# Altium PCB Controlador de velocidad - Placa fuente.PcbDoc
Units mil, origin at the board's own origin, x right, y up, seen from the top; angles counter-clockwise.
Board outline 3356.49 x 1466.72 mil, 2 copper layers (Top Layer, Bottom Layer); 28 components, 19 nets, 80 pads, 6 vias.
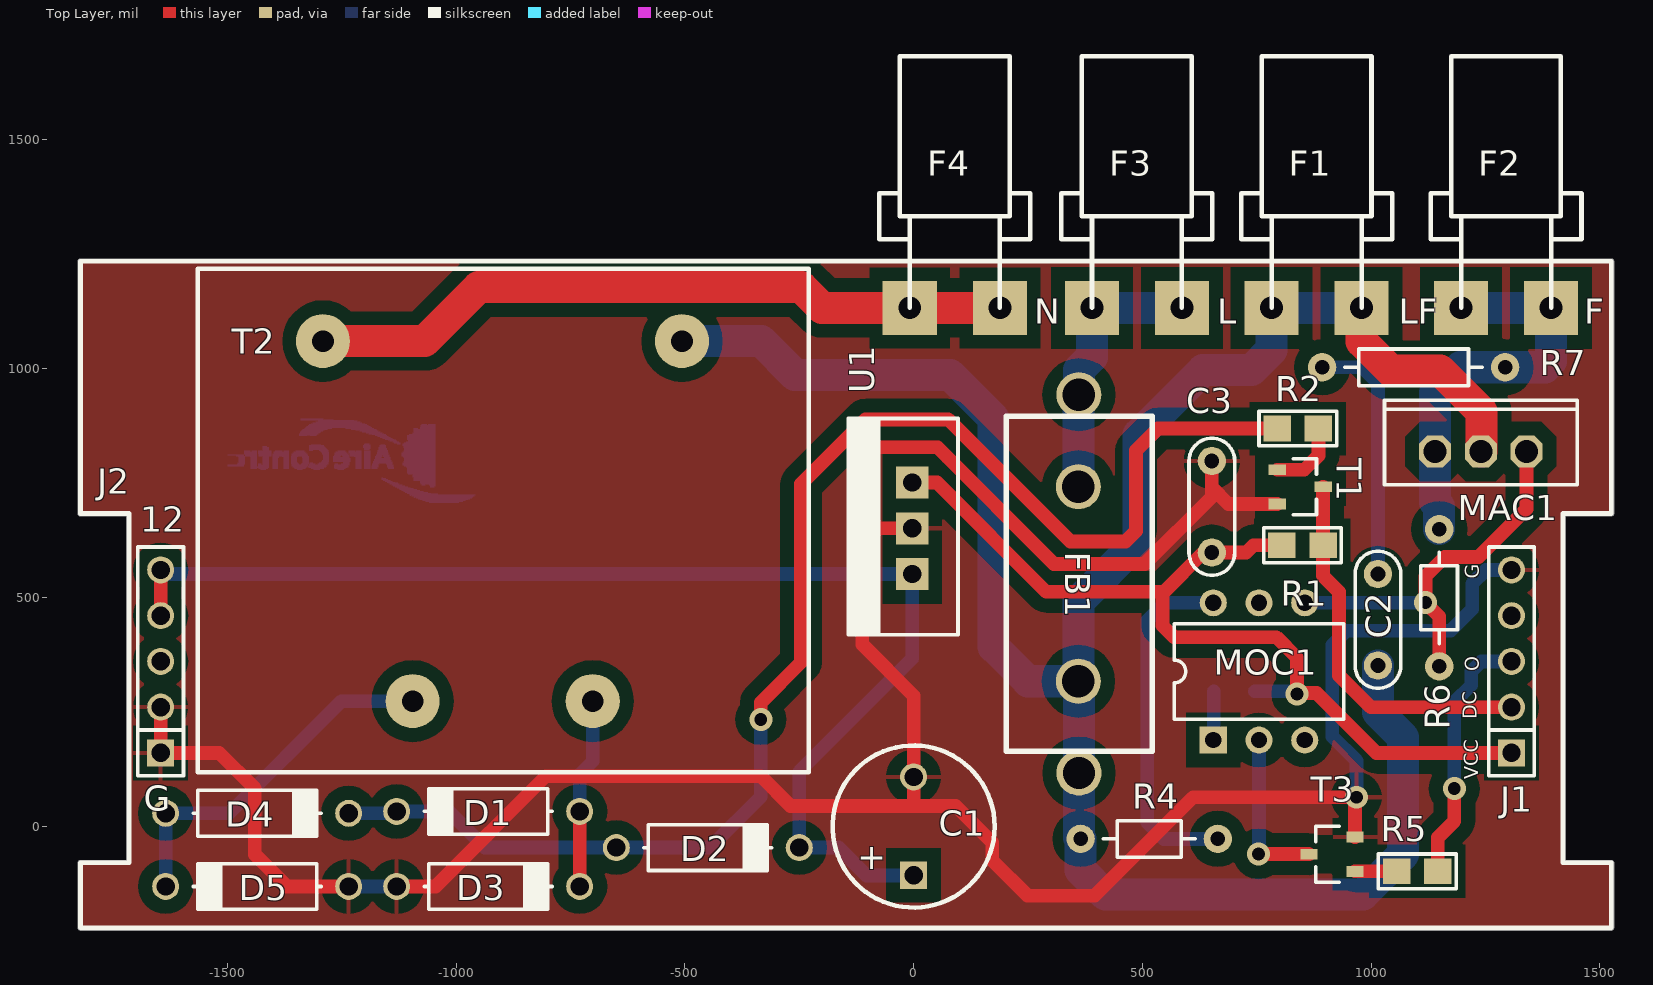
[diagram p0: Top Layer view]
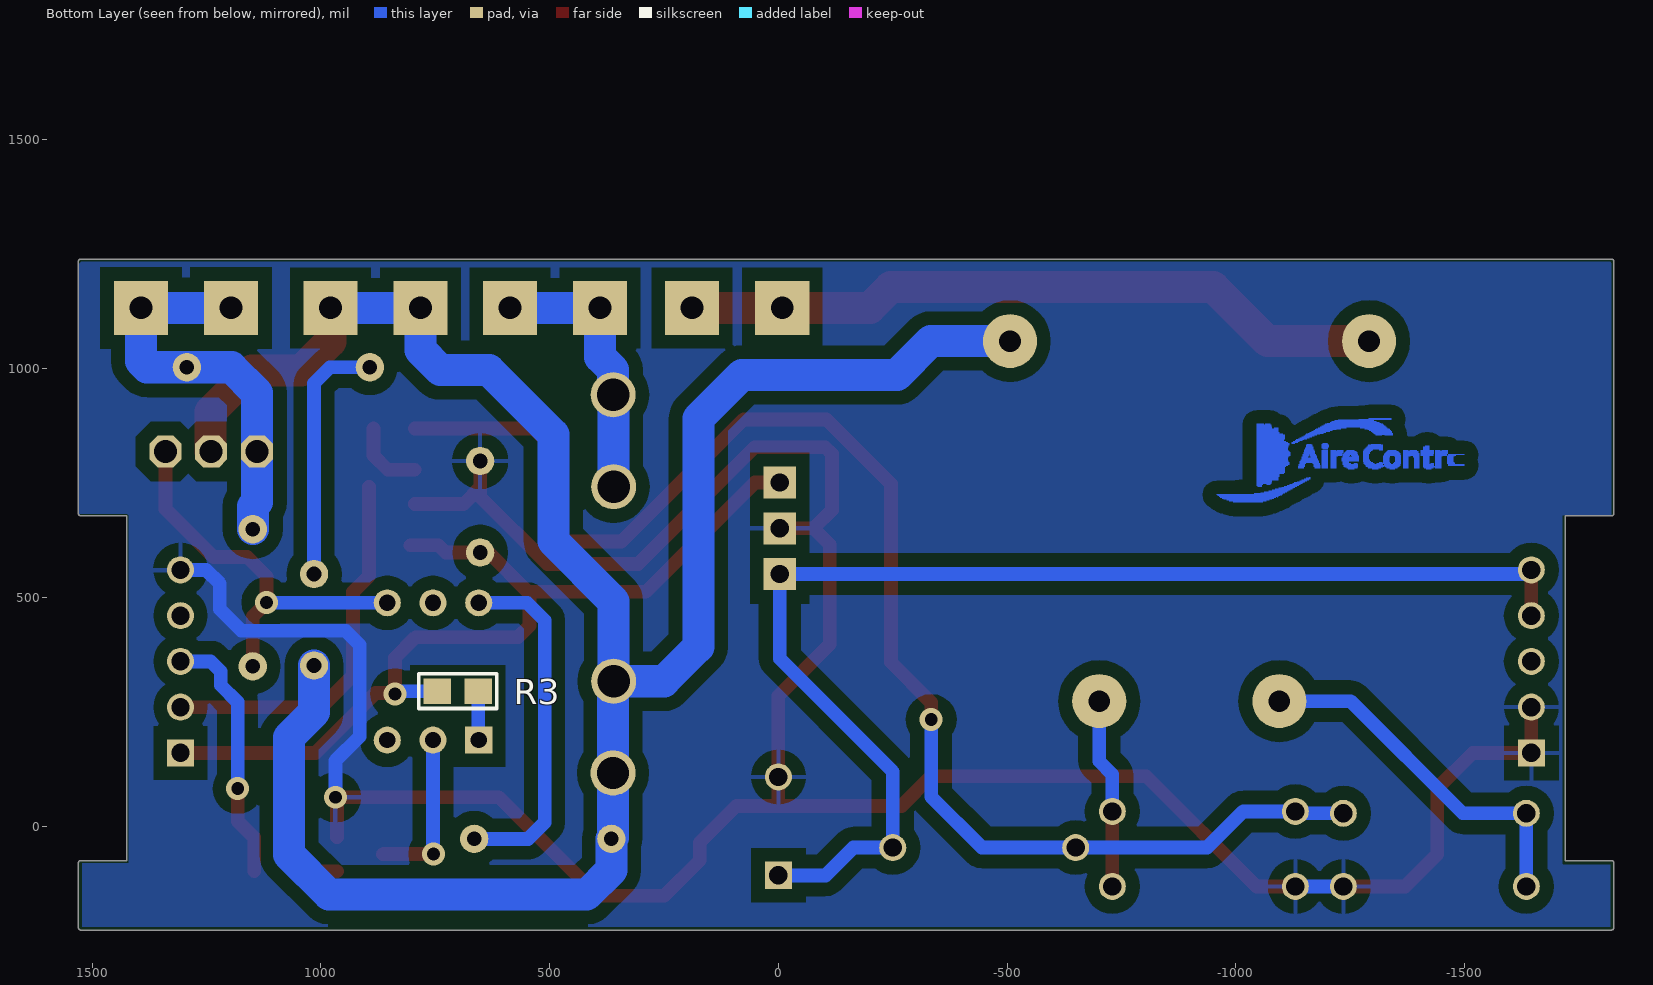
[diagram p1: Bottom Layer view, seen from below]

## Layer stack, top to bottom
Top Layer: signal copper 1.4
Dielectric: dielectric 12.6, FR-4, Dk 4.8
Bottom Layer: signal copper 1.4

## Board outline
-1821.25,-227.22 cw(c-1821.25,-222.21) -1826.26,-222.21 -1826.26,-80.48 cw(c-1821.25,-80.48) -1821.25,-75.46 -1719.96,-75.46 -1719.96,678.29 -1821.25,678.29 cw(c-1821.25,683.3) -1826.26,683.3 -1826.26,1234.48 cw(c-1821.25,1234.48) -1821.25,1239.5 1525.21,1239.5 cw(c1525.21,1234.48) 1530.22,1234.48 1530.22,683.3 cw(c1525.21,683.3) 1525.21,678.29 1423.92,678.29 1423.92,-75.46 1525.21,-75.46 cw(c1525.21,-80.48) 1530.22,-80.48 1530.22,-222.21 cw(c1525.21,-222.21) 1525.21,-227.22

## Design rules (kind name [scope] priority, off if disabled: settings)
Clearance GND [InPolygon] p1: gap=30
Clearance Clearance_1 [All] p2: gap=15
PolygonConnect [All] p1: connectstyle=Relief reliefconductorwidth=10 reliefentries=4 polygonreliefangle="90 Angle"
RoutingVias [All] p1: holewidth=28 width=50 viastyle="Through Hole" minholewidth=28 minwidth=50 maxholewidth=28 maxwidth=50
SilkscreenOverComponentPads SilkToSolderMaskClearance [IsPad] p1: minsilkscreentomaskgap=10
SolderMaskExpansion [All] p1: expansion=4
TestPointUsage FabricationTestPointUsage [All] p1: valid=0 allowmultiple=FALSE
Testpoint FabricationTestpoint [All] p1: side=3 testpointundercomponent=TRUE minsize=40 maxsize=100 preferedsize=60 minholesize=0 maxholesize=40 preferedholesize=32 testpointgrid=1 style=297 order=0123456789
Width 220V [InNet('L','220V','N','NetF3_1','NetF2_1')] p1: maxlimit=70 minlimit=10 preferedwidth=10 toplayer_minwidth=70 toplayer_prefwidth=70 bottomlayer_minwidth=70 bottomlayer_prefwidth=70 minimp=50.000000 maximp=50.000000 favimp=50.000000
Width Width_1 [All] p2: maxlimit=30 minlimit=10 preferedwidth=10 toplayer_minwidth=30 toplayer_prefwidth=30 bottomlayer_minwidth=30 bottomlayer_prefwidth=30 minimp=50.000000 maximp=50.000000 favimp=50.000000
23 further rules are at their usual default settings.

## Components (designator, comment, footprint, x,y, rotation, side; value= is the part's Value field where it differs from the comment)
C1 "1000uF/25V" CAP300RP 0,-1 r90 top
C2 "0.01uF" CAP200 1015,451 r90 top
C3 "CAP" CAP200 652,698 r270 top
D1 "DIODO" DO41 -930,32 r180 top
D2 "DIODO" DO41 -450,-47 r0 top
D3 "DIODO" DO41 -930,-132 r0 top
D4 "DIODO" DO41 -1435,28 r0 top
D5 "DIODO" DO41 -1435,-132 r180 top
F1 "Faston" Faston_V 881,1333 r0 top (schematic designator F11)
F2 "Faston" Faston_V 1295,1333 r0 top (schematic designator F11)
F3 "L" Faston_V 488,1333 r0 top (schematic designator F11)
F4 "N" Faston_V 90,1333 r0 top (schematic designator F11)
FB1 "Fusible" Porta_fuse_2 361,943 r270 top
J1 "CON5" SIP5 1307,160 r90 top
J2 "CON5" SIP5 -1646,160 r90 top
MAC1 "MAC8x" TO-220_vert 1140,819 r0 top (schematic designator MAC3)
MOC1 "MOC3023" 4N33 655,188 r0 top (schematic designator MOC3)
R1 "10K" 0805 850,614 r180 top
R2 "10K" 0805 840,869 r0 top
R3 "220" 0805 701,295 r0 bottom
R4 "1k" RES300 365,-28 r0 top
R5 "10k" 0805 1101,-99 r180 top
R6 "220" RES300 1149,649 r270 top
R7 "120" RES400 893,1003 r0 top
T1 "TRANSISTOR NPN" SOT23 795,779 r270 top
T2 "UC30D-2-120018" Trafo_220_12_1 -229,1218 r180 top (schematic designator T1)
T3 "TRANSISTOR NPN" SOT23 965,-99 r90 top (schematic designator T2)
U1 "7805" "TO-220 V" -3,651 r90 top

## Footprints (in the part's own frame and the unit in brackets; to place one, negate y for a bottom-side part, rotate by r counter-clockwise, add the part's x,y. Pads: shape width x height; smd on the part's side, far side on the other; paste and mask are expansions set on the pad)
4N33 [mm]
  rect 1.5x1.5 hole 0.9: 1(0,0)
  round 1.5 hole 0.9: 2(2.54,0) 3(5.08,0) 4(5.08,7.62) 5(2.54,7.62) 6(0,7.62)
  silkscreen extent -2.16,1.16 7.24,6.46
0805 [mil] "Pasivo 0805"
  rect 60x56 smd: 1(-45,0) 2(45,0)
  silkscreen extent -85,-38 85,38, body extent -40,-25 39,25, height 15
CAP200 [mil]
  round 62 hole 32: 1(-100,0) 2(100,0)
  silkscreen extent -150,-50 150,50, body extent -110,-46 110,44, height 246
CAP300RP [mm]
  rect 1.5x1.5 hole 1.016: 1(-2.705,0)
  round 1.5 hole 1.016: 2(2.755,0)
  silkscreen extent -4.5,-4.5 4.5,4.5
DO41 [mm]
  round 1.5 hole 1.016: 1(-5.08,0) 2(5.08,0)
  silkscreen extent -3.56,-1.27 3.56,1.27, body extent -5.46,-1.19 5.46,1.37, height 2.03
Faston_V [mm]
  round 1.651 on Top Overlay: 0(0,6.223)
  rect 3x3 hole 1.27: 1(-2.501,-5.08) 2(2.501,-5.08)
  silkscreen extent -4.19,-5.08 4.19,8.89
Porta_fuse_2 [mm] "10"
  round 2.5 hole 1.8: 1(0.003,0.002) 2(21.003,0.012) 3(15.91,-0.02) 4(5.11,-0.02)
  silkscreen extent 1.19,-4.03 19.79,4.07
RES300 [mil]
  round 62 hole 32: 1(0,0) 2(300,0)
  silkscreen extent 50,-40 250,40, body extent -10,-38 310,38, height 79
RES400 [mil]
  round 62 hole 32: 1(0,0) 2(400,0)
  silkscreen extent 50,-40 350,40, body extent -12,-45 412,46, height 96
SIP5 [mm]
  rect 1.5x1.5 hole 1.016: 1(0,0)
  round 1.5 hole 1.016: 2(2.54,0) 3(5.08,0) 4(7.62,0) 5(10.16,0)
  silkscreen extent -1.27,-1.27 11.43,1.27, body extent -1.27,-1.27 11.43,1.27, height 8.38
SOT23 [mm]
  rect 0.6x0.95 smd: 1(0,0) 2(0.95,2.55) 3(1.9,0)
  silkscreen extent -0.6,0.87 2.5,2.17, body extent -0.53,-0.25 2.47,2.88, height 1
"TO-220 V" [mil]
  rect 70x70 hole 40: 1(-100,0) 2(0,0) 3(100,0)
  silkscreen extent -232,-100 240,139, body extent -197,-79 197,118, height 709
TO-220_vert [mil]
  oct 70x70 hole 50: 1(0,0) 2(100,0) 3(200,0)
  silkscreen extent -111,-73 311,112
Trafo_220_12_1 [mm]
  round 3 hole 1.2: 1(26.98,4.01) 5(7.045,4.01) 7(12,24) 9(22,24)
  round 3 on Top Overlay: 6(7.02,23.95) 10(26.98,23.95)
  silkscreen extent 0.01,-0.02 33.92,27.95

## Part data
C1: library part CAPPOL
C2: library part CAP
F1 F2 F3 F4: library part FastonX1
FB1: library part Porta_fuse_1
R1 R2 R3 R4 R5 R6 R7: library part RES
T2: library part TRAFO_220_12_1
U1: library part 78XX, "REGULDOR POSITIVO"

## Via types
v1: diameter 50, hole 28, Top Layer to Bottom Layer, 6 vias

## Nets (pads, with @x,y where several pads share a name; then routed paths per layer and width w, separated by ;. In a path a pad name is that pad's centre, name@x,y a point inside that pad or via, vN(x,y) a via of type N, cw(c..) or ccw(c..) an arc to the next point about the centre after c; other vN are vias at no path point)
12V: C1.1 D2.2 J2.4 J2.5 U1.1 | length 2722.3
  Top Layer w30: J2.4 J2.5
  Bottom Layer w30: J2.5 -1637,551 U1.1 -3,366 -250,119 D2.2 -164,-47 -103,-108 C1.1@0,-108
DC0: J1.2 R1.1 T1.2 | length 832.8
  Top Layer w30: T1.2 895,741.2 R1.1 895,547 930,512 930,329 999,260 J1.2
GND: C1.2 C3.1 D3.1 D5.1 J1.5 J2.1 J2.2 T1.3 T3.3 U1.2 | length 6325.3
  Top Layer w30: J2.2 J2.1 -1518,160 -1440,82 -1440,-62 -1370,-132 D5.1 ; D3.1 -1045,-132 -804,109 -334,109 -269,44 -30,44 92,44 172,-36 172,-75 249,-152 396,-152 611,63 v1(968,63) ; U1.2 -77,651 ; 0,46 0,285 -112,397 -112,616 -77,651 ; T1.3 687.8,704.2 652,740 C3.1 652,720 505,573 307,573 52,828 -102.36,828 -117,813.36 -117,691 -77,651 ; T3.3 v1@965,60
  Bottom Layer w30: D5.1 D3.1 ; v1(968,63) 968,143 915,196 915,396 946,427 1174,427 1221,474 1221,530 1251,560 J1.5
L: C2.1 F1.1 F1.2 FB1.2 FB1.3 MAC1.2 R4.1 T2.5 | length 4817
  Top Layer w70: F1.2 979.46,1059.54 1043,996 1151,996 1241,906 MAC1.2@1241,819
  Bottom Layer w70: T2.5 -333.13,1060.13 -259,986 80,986 175,891 175,392 250.38,316.62 FB1.3 ; F1.2 F1.1 782.54,1040.54 739,997 633,997 492,856 492,623 360.21,491.21 FB1.3 ; C2.1 1015,249 1070,194 1070,-62 982,-150 419,-150 365,-96 R4.1 361.48,-24.48 FB1.2 361.48,315.36 FB1.3
N: F4.1 F4.2 T2.1 | length 1547.1
  Top Layer w70: T2.1 -1068.87,1060.13 -951,1178 -245,1178 -200,1133 F4.1 F4.2
NetC2_2: C2.2 R7.1 | length 553.5
  Bottom Layer w30: R7.1 980,1003 1015,968 C2.2
NetD1_1: D1.1 D3.2 T2.7 | length 416.9
  Top Layer w30: D3.2 D1.1
  Bottom Layer w30: D1.1 -730,113 -701.44,141.56 T2.7
NetD1_2: D1.2 D2.1 D4.2 R2.1 | length 3117.2
  Top Layer w30: v1(-334,233) -334,270 -246,358 -246,748 -105,889 76,889 343,622 463,622 486,645 486,821 534,869 R2.1
  Bottom Layer w30: D4.2 -1134,28 D1.2 -1016,32 -937,-47 D2.1 -445,-47 -334,64 v1(-334,233)
NetD4_1: D4.1 D5.2 T2.9 | length 801.4
  Bottom Layer w30: D5.2 D4.1 -1496,28 -1250.88,273.12 T2.9
NetF2_1: F2.1 F2.2 MAC1.1 R6.1 R7.2 | length 897.4
  Bottom Layer w70: R6.1 1149,699 1140,708 MAC1.1 1140,947 1196,1003 R7.2 1380,1003 1393.46,1016.46 F2.2 F2.1
NetF3_1: F3.1 F3.2 FB1.1 FB1.4 | length 600.3
  Bottom Layer w70: FB1.4 360.21,942.02 FB1.1 361.09,997.09 389.54,1025.54 F3.1 F3.2
NetMAC1_3: MAC1.3 MOC1.4 R6.2 | length 880.3
  Top Layer w30: R6.2 1149,458 1119,488 v1(1119,489) 1119,546 1161,588 1235,588 1340,693 MAC1.3
  Bottom Layer w30: MOC1.4 v1@1118,488
NetMOC1_1: MOC1.1 R3.1 | length 108.8
  Top Layer w30: MOC1.1 MOC1.1@656,187
  Bottom Layer w30: MOC1.1 656,189 R3.1
NetMOC1_2: MOC1.2 T3.2 | length 358.9
  Top Layer w30: v1(754,-61) 864.01,-61 T3.2
  Bottom Layer w30: v1@755,-60 MOC1.2
NetMOC1_6: MOC1.6 R4.2 | length 770.7
  Bottom Layer w30: MOC1.6 549,488 511,450 511,8 547,-28 R4.2
NetR2_2: R2.2 T1.1 | length 161.8
  Top Layer w30: T1.1 854,779 885,810 R2.2
NetR5_2: R5.2 T3.1 | length 91
  Top Layer w30: T3.1 R5.2
OPTO: J1.3 R5.1 | length 564.4
  Top Layer w30: R5.1 1146,-25 1182,11 v1(1182,82)
  Bottom Layer w30: v1(1182,82) 1182,271 1219,308 1219,338 1241,360 J1.3
VCC: C3.2 J1.1 R1.2 R3.2 U1.3 | length 2156.4
  Top Layer w30: U1.3 51,751 290,512 547,512 C3.2@633,598 ; R1.2 743,614 727,598 C3.2 C3.2@633,598 ; v1(838,289) 838,368 793,413 569,413 544,438 544,509 C3.2@633,598 ; v1@841,291 881,291 1012,160 J1.1
  Bottom Layer w30: R3.2 v1@834,295
pads on no net: F1.0 F2.0 F3.0 F4.0 J1.4 J2.3 MOC1.3 MOC1.5 T2.6 T2.10
copper on no net: | length 23262
  Bottom Layer w1: -1499,788 -1464,788 ; -1499,789 -1464,789 ; -1499,790 -1464,790 ; -1499,812 -1464,812 ; -1481,810 -1464,810 ; -1481,811 -1464,811 ; -1479,791 -1464,791 ; -1479,792 -1462,792 ; -1477,793 -1462,793 ; -1477,794 -1462,794 ; -1477,808 -1462,808 ; -1477,809 -1464,809 ; -1475,795 -1462,795 ; -1475,796 -1462,796 ; -1475,797 -1462,797 ; -1475,798 -1462,798 ; -1475,799 -1462,799 ; -1475,800 -1462,800 ; -1475,801 -1462,801 ; -1475,802 -1462,802 ; -1475,803 -1462,803 ; -1475,804 -1462,804 ; -1475,805 -1462,805 ; -1475,806 -1462,806 ; -1475,807 -1462,807 ; -1463,814 -1436,814 ; -1463,815 -1436,815 ; -1463,816 -1436,816 ; -1463,817 -1436,817 ; -1463,818 -1436,818 ; -1463,819 -1450,819 ; -1463,820 -1450,820 ; -1461,810 -1436,810 ; -1461,811 -1436,811 ; -1461,812 -1436,812 ; -1461,813 -1436,813 ; -1451,808 -1436,808 ; -1451,809 -1436,809 ; -1449,782 -1436,782 ; -1449,783 -1436,783 ; -1449,784 -1436,784 ; -1449,785 -1436,785 ; -1449,786 -1436,786 ; -1449,787 -1436,787 ; -1449,788 -1436,788 ; -1449,789 -1436,789 ; -1449,790 -1436,790 ; -1449,791 -1436,791 ; -1449,792 -1436,792 ; -1449,793 -1436,793 ; -1449,794 -1436,794 ; -1449,795 -1436,795 ; -1449,796 -1436,796 ; -1449,797 -1436,797 ; -1449,798 -1436,798 ; -1449,799 -1436,799 ; -1449,800 -1436,800 ; -1449,801 -1436,801 ; -1449,802 -1436,802 ; -1449,803 -1436,803 ; -1449,804 -1436,804 ; -1449,805 -1436,805 ; -1449,806 -1436,806 ; -1449,807 -1436,807 ; -1447,819 -1436,819 ; -1447,820 -1436,820 ; -1435,784 -1410,784 ; -1435,785 -1410,785 ; -1435,786 -1410,786 ; -1433,787 -1410,787 ; -1433,788 -1410,788 ; -1433,789 -1410,789 ; -1433,790 -1410,790 ; -1433,791 -1426,791 ; -1433,792 -1426,792 ; -1433,814 -1404,814 ; -1433,815 -1404,815 ; -1433,816 -1404,816 ; -1433,817 -1404,817 ; -1433,818 -1404,818 ; -1433,819 -1404,819 ; -1433,820 -1404,820 ; -1431,782 -1412,782 ; -1431,783 -1412,783 ; -1431,810 -1404,810 ; -1431,811 -1404,811 ; -1431,812 -1404,812 ; -1431,813 -1404,813 ; -1427,780 -1416,780 ; -1427,781 -1416,781 ; -1423,791 -1410,791 ; -1423,792 -1410,792 ; -1423,793 -1410,793 ; -1423,794 -1410,794 ; -1423,795 -1410,795 ; -1423,796 -1410,796 ; -1423,797 -1410,797 ; -1423,798 -1410,798 ; -1423,799 -1410,799 ; -1423,800 -1410,800 ; -1423,801 -1410,801 ; -1423,802 -1410,802 ; -1423,803 -1410,803 ; -1423,804 -1410,804 ; -1423,805 -1410,805 ; -1423,806 -1410,806 ; -1423,807 -1410,807 ; -1423,808 -1410,808 ; -1423,809 -1410,809 ; -1423,821 -1410,821 ; -1423,822 -1410,822 ; -1423,823 -1410,823 ; -1423,824 -1410,824 ; -1423,825 -1410,825 ; -1423,826 -1410,826 ; -1423,827 -1410,827 ; -1423,828 -1410,828 ; -1423,829 -1414,829 ; -1423,830 -1414,830 ; -1401,782 -1390,782 ; -1401,783 -1390,783 ; -1401,784 -1390,784 ; -1401,785 -1390,785 ; -1401,786 -1390,786 ; -1401,787 -1390,787 ; -1401,788 -1390,788 ; -1401,789 -1390,789 ; -1401,790 -1390,790 ; -1401,791 -1390,791 ; -1401,792 -1390,792 ; -1401,793 -1390,793 ; -1401,794 -1390,794 ; -1401,795 -1390,795 ; -1401,796 -1390,796 ; -1401,797 -1390,797 ; -1401,798 -1390,798 ; -1401,799 -1390,799 ; -1401,800 -1390,800 ; -1401,801 -1390,801 ; -1401,802 -1390,802 ; -1401,803 -1390,803 ; -1401,804 -1390,804 ; -1401,805 -1390,805 ; -1401,806 -1388,806 ; -1401,807 -1388,807 ; -1401,808 -1388,808 ; -1401,809 -1388,809 ; -1401,810 -1366,810 ; -1401,811 -1366,811 ; -1401,812 -1366,812 ; -1401,813 -1366,813 ; -1401,814 -1366,814 ; -1399,815 -1366,815 ; -1399,816 -1366,816 ; -1399,817 -1366,817 ; -1399,818 -1366,818 ; -1395,819 -1380,819 ; -1395,820 -1380,820 ; -1381,808 -1366,808 ; -1381,809 -1366,809 ; -1377,782 -1366,782 ; -1377,783 -1366,783 ; -1377,784 -1366,784 ; -1377,785 -1366,785 ; -1377,786 -1366,786 ; -1377,787 -1366,787 ; -1377,788 -1366,788 ; -1377,789 -1366,789 ; -1377,790 -1366,790 ; -1377,791 -1366,791 ; -1377,792 -1366,792 ; -1377,793 -1366,793 ; -1377,794 -1366,794 ; -1377,795 -1366,795 ; -1377,796 -1366,796 ; -1377,797 -1366,797 ; -1377,798 -1366,798 ; -1377,799 -1366,799 ; -1377,800 -1366,800 ; -1377,801 -1366,801 ; -1377,802 -1366,802 ; -1377,803 -1366,803 ; -1377,804 -1366,804 ; -1377,805 -1366,805 ; -1377,806 -1366,806 ; -1377,807 -1366,807 ; -1377,819 -1366,819 ; -1377,820 -1366,820 ; -1361,792 -1344,792 ; -1361,793 -1346,793 ; -1361,794 -1346,794 ; -1361,795 -1348,795 ; -1361,796 -1348,796 ; -1361,797 -1348,797 ; -1361,798 -1348,798 ; -1361,799 -1348,799 ; -1361,800 -1348,800 ; -1361,801 -1348,801 ; -1361,802 -1348,802 ; -1361,803 -1348,803 ; -1361,804 -1348,804 ; -1361,805 -1348,805 ; -1361,806 -1348,806 ; -1361,807 -1348,807 ; -1361,808 -1346,808 ; -1361,809 -1346,809 ; -1361,810 -1342,810 ; -1359,788 -1324,788 ; -1359,789 -1324,789 ; -1359,790 -1324,790 ; -1359,791 -1344,791 ; -1359,811 -1342,811 ; -1359,812 -1324,812 ; -1359,813 -1326,813 ; -1359,814 -1326,814 ; -1357,786 -1326,786 ; -1357,787 -1326,787 ; -1357,815 -1328,815 ; -1357,816 -1328,816 ; -1355,784 -1328,784 ; -1355,785 -1328,785 ; -1355,817 -1330,817 ; -1355,818 -1330,818 ; -1353,782 -1330,782 ; -1353,783 -1330,783 ; -1351,819 -1332,819 ; -1351,820 -1332,820 ; -1347,780 -1336,780 ; -1347,781 -1336,781 ; -1343,854 -1326,854 ; -1343,855 -1306,855 ; -1343,856 -1304,856 ; -1343,857 -1304,857 ; -1343,858 -1302,858 ; -1341,810 -1324,810 ; -1341,811 -1324,811 ; -1341,859 -1302,859 ; -1341,860 -1299,860 ; -1341,861 -1298,861 ; -1341,862 -1296,862 ; -1339.38,888 -1268.38,888 ; -1339.38,889 -1290.38,889 ; -1339.38,890 -1290.38,890 ; -1339,791 -1324,791 ; -1339,792 -1322,792 ; -1339,863 -1296,863 ; -1339,864 -1292,864 ; -1337,793 -1322,793 ; -1337,794 -1322,794 ; -1337,806 -1322,806 ; -1337,807 -1322,807 ; -1337,808 -1322,808 ; -1337,809 -1324,809 ; -1337,865 -1292,865 ; -1337,866 -1288,866 ; -1335,795 -1322,795 ; -1335,796 -1322,796 ; -1335,797 -1322,797 ; -1335,798 -1322,798 ; -1335,799 -1322,799 ; -1335,800 -1322,800 ; -1335,801 -1322,801 ; -1335,802 -1322,802 ; -1335,803 -1322,803 ; -1335,804 -1322,804 ; -1335,805 -1322,805 ; -1335,867 -1288,867 ; -1335,868 -1282,868 ; -1331,869 -1282,869 ; -1331,870 -1272,870 ; -1329,871 -1272,871 ; -1329,872 -1184,872 ; -1327,873 -1188,873 ; -1327,874 -1188,874 ; -1323,786 -1285,786 ; -1323,787 -1284,787 ; -1323,788 -1284,788 ; -1323,875 -1192,875 ; -1323,876 -1192,876 ; -1321,784 -1288,784 ; -1321,785 -1288,785 ; -1321,789 -1284,789 ; -1321,790 -1282,790 ; -1321,791 -1308,791 ; -1321,792 -1308,792 ; -1321,822 -1314,822 ; -1321,823 -1314,823 ; -1321,824 -1282,824 ; -1321,825 -1284,825 ; -1321,826 -1284,826 ; -1321,827 -1286,827 ; -1321,828 -1286,828 ; -1321,829 -1288,829 ; -1321,830 -1288,830 ; -1321,831 -1290,831 ; -1321,832 -1290,832 ; -1321,877 -1196,877 ; -1321,878 -1196,878 ; -1320,793 -1314,793 ; -1320,794 -1314,794 ; -1319,854 -1316,854 ; -1317,782 -1290,782 ; -1317,783 -1290,783 ; -1317,833 -1296,833 ; -1317,834 -1296,834 ; -1317,879 -1200,879 ; -1317,880 -1200,880 ; -1315,854 -1306,854 ; -1313,881 -1206,881 ; -1313,882 -1206,882 ; -1311,780 -1298,780 ; -1311,781 -1298,781 ; -1307,883 -1210,883 ; -1307,884 -1210,884 ; -1303,791 -1282,791 ; -1303,792 -1280,792 ; -1301,885 -1216,885 ; -1301,886 -1216,886 ; -1299,793 -1280,793 ; -1299,794 -1280,794 ; -1299,822 -1280,822 ; -1299,823 -1282,823 ; -1297,820 -1280,820 ; -1297,821 -1280,821 ; -1295,795 -1280,795 ; -1295,796 -1278,796 ; -1295,818 -1278,818 ; -1295,819 -1280,819 ; -1295,887 -1224,887 ; -1293,797 -1278,797 ; -1293,798 -1278,798 ; -1293,799 -1278,799 ; -1293,800 -1278,800 ; -1293,814 -1278,814 ; -1293,815 -1278,815 ; -1293,816 -1278,816 ; -1293,817 -1278,817 ; -1291,801 -1278,801 ; -1291,802 -1278,802 ; -1291,803 -1278,803 ; -1291,804 -1278,804 ; -1291,805 -1278,805 ; -1291,806 -1278,806 ; -1291,807 -1278,807 ; -1291,808 -1278,808 ; -1291,809 -1278,809 ; -1291,810 -1278,810 ; -1291,811 -1278,811 ; -1291,812 -1278,812 ; -1291,813 -1278,813 ; -1269,798 -1232,798 ; -1269,799 -1232,799 ; -1269,800 -1232,800 ; -1269,801 -1232,801 ; -1269,802 -1232,802 ; -1269,803 -1232,803 ; -1269,804 -1232,804 ; -1269,805 -1234,805 ; -1269,806 -1234,806 ; -1269,807 -1256,807 ; -1269,808 -1254,808 ; -1267,784 -1238,784 ; -1267,785 -1238,785 ; -1267,786 -1236,786 ; -1267,787 -1236,787 ; -1267,788 -1236,788 ; -1267,789 -1236,789 ; -1267,790 -1234,790 ; -1267,809 -1254,809 ; -1267,810 -1252,810 ; -1267,811 -1252,811 ; -1267,812 -1235,812 ; -1265,782 -1242,782 ; -1265,783 -1242,783 ; -1265,791 -1258,791 ; -1265,792 -1259,792 ; -1265,813 -1236,813 ; -1265,814 -1236,814 ; -1265,815 -1238,815 ; -1265,816 -1238,816 ; -1263,817 -1240,817 ; -1263,818 -1240,818 ; -1259,780 -1246,780 ; -1259,781 -1246,781 ; -1259,819 -1242,819 ; -1259,820 -1242,820 ; -1251,791 -1234,791 ; -1251,792 -1234,792 ; -1249,810 -1234,810 ; -1249,811 -1234,811 ; -1247,793 -1234,793 ; -1247,794 -1234,794 ; -1247,795 -1234,795 ; -1247,796 -1234,796 ; -1247,808 -1234,808 ; -1247,809 -1234,809 ; -1245,797 -1234,797 ; -1245,807 -1234,807 ; -1241,870 -1180,870 ; -1241,871 -1184,871 ; -1235,816 -1208,816 ; -1235,817 -1208,817 ; -1235,818 -1208,818 ; -1235,819 -1222,819 ; -1235,820 -1222,820 ; -1233,812 -1208,812 ; -1233,813 -1208,813 ; -1233,814 -1208,814 ; -1233,815 -1208,815 ; -1231,810 -1208,810 ; -1231,811 -1208,811 ; -1229,868 -1177,868 ; -1229,869 -1180,869 ; -1223,808 -1208,808 ; -1223,809 -1208,809 ; -1219,782 -1208,782 ; -1219,783 -1208,783 ; -1219,784 -1208,784 ; -1219,785 -1208,785 ; -1219,786 -1208,786 ; -1219,787 -1208,787 ; -1219,788 -1208,788 ; -1219,789 -1208,789 ; -1219,790 -1208,790 ; -1219,791 -1208,791 ; -1219,792 -1208,792 ; -1219,793 -1208,793 ; -1219,794 -1208,794 ; -1219,795 -1208,795 ; -1219,796 -1208,796 ; -1219,797 -1208,797 ; -1219,798 -1208,798 ; -1219,799 -1208,799 ; -1219,800 -1208,800 ; -1219,801 -1208,801 ; -1219,802 -1208,802 ; -1219,803 -1208,803 ; -1219,804 -1208,804 ; -1219,805 -1208,805 ; -1219,806 -1208,806 ; -1219,807 -1208,807 ; -1219,819 -1208,819 ; -1219,820 -1208,820 ; -1219,866 -1174,866 ; -1219,867 -1176,867 ; -1211,864 -1170,864 ; -1211,865 -1174,865 ; -1205,862 -1166,862 ; -1205,863 -1170,863 ; -1203,828 -1188,828 ; -1203,829 -1188,829 ; -1203,830 -1188,830 ; -1203,831 -1188,831 ; -1203,832 -1188,832 ; -1201,782 -1188,782 ; -1201,783 -1188,783 ; -1201,784 -1188,784 ; -1201,785 -1188,785 ; -1201,786 -1188,786 ; -1201,787 -1188,787 ; -1201,788 -1188,788 ; -1201,789 -1188,789 ; -1201,790 -1188,790 ; -1201,791 -1188,791 ; -1201,792 -1188,792 ; -1201,793 -1188,793 ; -1201,794 -1188,794 ; -1201,795 -1188,795 ; -1201,796 -1188,796 ; -1201,797 -1188,797 ; -1201,798 -1188,798 ; -1201,799 -1188,799 ; -1201,800 -1188,800 ; -1201,801 -1188,801 ; -1201,802 -1188,802 ; -1201,803 -1188,803 ; -1201,804 -1188,804 ; -1201,805 -1188,805 ; -1201,806 -1188,806 ; -1201,807 -1188,807 ; -1201,808 -1188,808 ; -1201,809 -1188,809 ; -1201,810 -1188,810 ; -1201,811 -1188,811 ; -1201,812 -1188,812 ; -1201,813 -1188,813 ; -1201,814 -1188,814 ; -1201,815 -1188,815 ; -1201,816 -1188,816 ; -1201,817 -1188,817 ; -1201,818 -1188,818 ; -1201,819 -1188,819 ; -1201,820 -1188,820 ; -1201,824 -1190,824 ; -1201,825 -1190,825 ; -1201,826 -1188,826 ; -1201,827 -1188,827 ; -1201,833 -1188,833 ; -1201,834 -1188,834 ; -1201,835 -1190,835 ; -1200,836 -1190,836 ; -1197,860 -1162,860 ; -1197,861 -1166,861 ; -1191,858 -1158,858 ; -1191,859 -1162,859 ; -1185,782 -1172,782 ; -1185,783 -1172,783 ; -1185,784 -1172,784 ; -1185,785 -1172,785 ; -1185,786 -1170,786 ; -1185,787 -1170,787 ; -1185,788 -1170,788 ; -1183,789 -1170,789 ; -1183,790 -1170,790 ; -1183,791 -1170,791 ; -1183,792 -1168,792 ; -1183,856 -1154,856 ; -1183,857 -1158,857 ; -1181,793 -1168,793 ; -1181,794 -1140,794 ; -1181,795 -1140,795 ; -1181,796 -1140,796 ; -1181,797 -1142,797 ; -1181,798 -1142,798 ; -1179,799 -1142,799 ; -1179,800 -1142,800 ; -1179,801 -1144,801 ; -1179,802 -1144,802 ; -1177,803 -1144,803 ; -1177,804 -1144,804 ; -1177,805 -1164,805 ; -1177,806 -1164,806 ; -1177,807 -1164,807 ; -1177,808 -1162,808 ; -1177,854 -1152,854 ; -1177,855 -1154,855 ; -1175,809 -1162,809 ; -1175,810 -1162,810 ; -1175,811 -1162,811 ; -1175,812 -1162,812 ; -1173,813 -1162,813 ; -1173,814 -1148,814 ; -1173,815 -1148,815 ; -1173,816 -1148,816 ; -1173,817 -1150,817 ; -1173,818 -1150,818 ; -1171,819 -1150,819 ; -1171,820 -1150,820 ; -1171,821 -1150,821 ; -1171,822 -1150,822 ; -1171,852 -1148,852 ; -1171,853 -1152,853 ; -1169,823 -1152,823 ; -1169,824 -1152,824 ; -1169,825 -1152,825 ; -1169,826 -1152,826 ; -1169,827 -1154,827 ; -1169,828 -1154,828 ; -1167,829 -1154,829 ; -1167,830 -1154,830 ; -1167,831 -1154,831 ; -1167,832 -1154,832 ; -1166,850 -1144,850 ; -1166,851 -1148,851 ; -1165,833 -1156,833 ; -1165,834 -1156,834 ; -1163,758 -1150,758 ; -1163,759 -1154,759 ; -1163,760 -1154,760 ; -1163,761 -1160,761 ; -1163,762 -1160,762 ; -1161,848 -1140,848 ; -1161,849 -1144,849 ; -1160,813 -1148,813 ; -1159,756 -1144,756 ; -1159,757 -1150,757 ; -1159,808 -1146,808 ; -1159,809 -1146,809 ; -1159,810 -1146,810 ; -1159,811 -1146,811 ; -1159,812 -1146,812 ; -1157,805 -1144,805 ; -1157,806 -1144,806 ; -1157,807 -1146,807 ; -1155,754 -1140,754 ; -1155,755 -1144,755 ; -1155,846 -1136,846 ; -1155,847 -1140,847 ; -1153,792 -1140,792 ; -1153,793 -1140,793 ; -1151,752 -1134,752 ; -1151,753 -1140,753 ; -1151,786 -1136,786 ; -1151,787 -1138,787 ; -1151,788 -1138,788 ; -1151,789 -1138,789 ; -1151,790 -1138,790 ; -1151,791 -1140,791 ; -1149,782 -1136,782 ; -1149,783 -1136,783 ; -1149,784 -1136,784 ; -1149,785 -1136,785 ; -1149,844 -1132,844 ; -1149,845 -1136,845 ; -1147,750 -1128,750 ; -1147,751 -1134,751 ; -1145,748 -1124,748 ; -1145,749 -1128,749 ; -1145,842 -1130,842 ; -1145,843 -1132,843 ; -1141,746 -1118,746 ; -1141,747 -1124,747 ; -1139,840 -1126,840 ; -1139,841 -1130,841 ; -1137,744 -1112,744 ; -1137,745 -1118,745 ; -1135,838 -1122,838 ; -1135,839 -1126,839 ; -1133,742 -1106,742 ; -1133,743 -1112,743 ; -1129,740 -1100,740 ; -1129,741 -1106,741 ; -1129,836 -1122,836 ; -1129,837 -1122,837 ; -1125,738 -1094,738 ; -1125,739 -1100,739 ; -1123,736 -1086,736 ; -1123,737 -1094,737 ; -1119,734 -1080,734 ; -1119,735 -1086,735 ; -1119,810 -1046,810 ; -1119,811 -1046,811 ; -1119,812 -1046,812 ; -1119,813 -1046,813 ; -1119,814 -1046,814 ; -1119,815 -1046,815 ; -1119,816 -1046,816 ; -1117,790 -1046,790 ; -1117,791 -1046,791 ; -1117,792 -1046,792 ; -1117,793 -1046,793 ; -1117,794 -1046,794 ; -1117,808 -1046,808 ; -1117,809 -1046,809 ; -1117,817 -1046,817 ; -1117,818 -1046,818 ; -1117,832 -1046,832 ; -1117,833 -1046,833 ; -1117,834 -1046,834 ; -1117,835 -1046,835 ; -1117,836 -1046,836 ; -1115,732 -1072,732 ; -1115,733 -1080,733 ; -1115,795 -1046,795 ; -1115,796 -1046,796 ; -1115,797 -1046,797 ; -1115,798 -1046,798 ; -1115,806 -1046,806 ; -1115,807 -1046,807 ; -1115,819 -1046,819 ; -1115,820 -1046,820 ; -1115,828 -1046,828 ; -1115,829 -1046,829 ; -1115,830 -1046,830 ; -1115,831 -1046,831 ; -1113,788 -1046,788 ; -1113,789 -1046,789 ; -1113,799 -1046,799 ; -1113,800 -1046,800 ; -1113,801 -1046,801 ; -1113,802 -1046,802 ; -1113,804 -1046,804 ; -1113,805 -1046,805 ; -1113,821 -1046,821 ; -1113,822 -1046,822 ; -1113,824 -1046,824 ; -1113,825 -1046,825 ; -1113,826 -1046,826 ; -1113,827 -1046,827 ; -1113,837 -1046,837 ; -1113,838 -1046,838 ; -1111,730 -1062,730 ; -1111,731 -1072,731 ; -1111,803 -1046,803 ; -1111,823 -1046,823 ; -1109,786 -1046,786 ; -1109,787 -1046,787 ; -1109,839 -1046,839 ; -1109,840 -1046,840 ; -1107,728 -1054,728 ; -1107,729 -1062,729 ; -1107,772 -1046,772 ; -1107,773 -1046,773 ; -1107,774 -1046,774 ; -1107,775 -1046,775 ; -1107,776 -1046,776 ; -1107,777 -1046,777 ; -1107,778 -1046,778 ; -1107,779 -1046,779 ; -1107,780 -1046,780 ; -1107,781 -1046,781 ; -1107,782 -1046,782 ; -1107,784 -1046,784 ; -1107,785 -1046,785 ; -1107,846 -1046,846 ; -1107,847 -1046,847 ; -1107,848 -1046,848 ; -1107,849 -1046,849 ; -1107,850 -1046,850 ; -1107,851 -1046,851 ; -1107,852 -1046,852 ; -1107,853 -1046,853 ; -1107,854 -1046,854 ; -1105,770 -1046,770 ; -1105,771 -1046,771 ; -1105,783 -1046,783 ; -1105,841 -1046,841 ; -1105,842 -1046,842 ; -1105,843 -1046,843 ; -1105,844 -1046,844 ; -1105,845 -1046,845 ; -1103,726 -1040,726 ; -1103,727 -1054,727 ; -1103,855 -1046,855 ; -1103,856 -1046,856 ; -1101,724 -958,724 ; -1100,723 -1099,723 ; -1099,725 -1040,725 ; -1097,722 -960,722 ; -1097,723 -960,723 ; -1095,764 -1046,764 ; -1095,765 -1046,765 ; -1095,766 -1046,766 ; -1095,767 -1046,767 ; -1095,768 -1046,768 ; -1095,769 -1046,769 ; -1095,857 -1046,857 ; -1095,858 -1046,858 ; -1095,859 -1046,859 ; -1095,860 -1046,860 ; -1093,720 -964,720 ; -1093,721 -964,721 ; -1093,756 -1046,756 ; -1093,757 -1046,757 ; -1093,758 -1046,758 ; -1093,759 -1046,759 ; -1093,760 -1046,760 ; -1093,761 -1046,761 ; -1093,762 -1046,762 ; -1093,763 -1046,763 ; -1093,861 -1046,861 ; -1093,862 -1046,862 ; -1093,863 -1046,863 ; -1093,864 -1046,864 ; -1093,865 -1046,865 ; -1093,866 -1046,866 ; -1093,867 -1046,867 ; -1093,868 -1046,868 ; -1093,869 -1084,869 ; -1093,870 -1084,870 ; -1092,719 -1091,719 ; -1087,718 -966,718 ; -1087,719 -966,719 ; -1083,716 -970,716 ; -1083,717 -970,717 ; -1079,714 -974,714 ; -1079,715 -974,715 ; -1079,752 -1046,752 ; -1079,753 -1046,753 ; -1079,754 -1046,754 ; -1079,755 -1046,755 ; -1079,869 -1046,869 ; -1079,870 -1046,870 ; -1079,871 -1046,871 ; -1079,872 -1046,872 ; -1077,748 -1062,748 ; -1077,749 -1062,749 ; -1077,750 -1046,750 ; -1077,751 -1046,751 ; -1077,873 -1046,873 ; -1077,874 -1046,874 ; -1077,875 -1046,875 ; -1077,876 -1046,876 ; -1075,746 -1068,746 ; -1075,747 -1068,747 ; -1075,877 -1064,877 ; -1075,878 -1064,878 ; -1073,712 -980,712 ; -1073,713 -980,713 ; -1067,710 -986,710 ; -1067,711 -986,711 ; -1061,748 -1046,748 ; -1061,749 -1046,749 ; -1061,877 -1046,877 ; -1061,878 -1046,878 ; -1059,708 -994,708 ; -1059,709 -994,709 ; -1059,746 -1046,746 ; -1059,747 -1046,747 ; -1057,742 -1048,742 ; -1057,743 -1048,743 ; -1057,744 -1046,744 ; -1057,745 -1046,745

## Polygon pours and split planes (outlines as drawn)
GND on Top Layer "Bottom Layer-No Net" (solid, remove dead copper, pour order 4): -1820,1232 1523,1232 1524,1231 1529.63,1225.37 1529.63,681.3 1423.3,681.3 1419,677 1419,-83 1521,-83 1521,-222 -1822,-222 -1823,-223 -1820,-220 -1820,-86 -1717,-86 -1715,-84 -1715,678 -1822.84,678 -1824.17,676.67 -1822,678.84 -1822,1228
GND on Bottom Layer "Bottom Layer-No Net" (solid, remove dead copper, pour order 3): -1819,1234 1524,1234 1525,1233 1530.63,1227.37 1530.63,683.3 1424.3,683.3 1420,679 1420,-81 1522,-81 1522,-220 -1821,-220 -1822,-221 -1819,-218 -1819,-84 -1716,-84 -1714,-82 -1714,680 -1821.84,680 -1823.17,678.67 -1821,680.84 -1821,1230

## Silkscreen, mask and mechanical layers (free items; w line width, h text height)
Top Overlay:
  lines w10: -1821.25,-222.21 1525.21,-222.21 1525.21,-80.48 1418.91,-80.48 1418.91,683.3 1525.21,683.3 1525.21,1234.48 -1821.25,1234.48 -1821.25,683.3 -1714.95,683.3 -1714.95,-80.48 -1821.25,-80.48 -1821.25,-222.21
  text "N" at 264,1098 h55
  text "L" at 664,1098 h55
  text "LF" at 1060,1098 h55
  text "F" at 1466.54,1098 h55
  text "12" at -1691,643 h55
  text "G" at 1237,541 h30 r90
  text "O" at 1237,339 h30 r90
  text "DC" at 1231,234 h30 r90
  text "VCC" at 1234,102 h30 r90
  text "G" at -1683,33 h55

## Text inside footprints (layer, text, board x,y; h text height)
C1: Top Overlay "+" at -60,-46 h55 r180